# Altium PCB NCLP_PI_v2.PcbDoc (part 2 of 2)
Units mm, origin at the board's own origin, x right, y up, seen from the top; angles counter-clockwise.
Board outline 75.03 x 78.89 mm, 6 copper layers (Top Layer, In_1, In_2, In_3, In_4, Bottom Layer), stack 0.816 mm thick; 104 components, 121 nets, 419 pads, 484 vias.
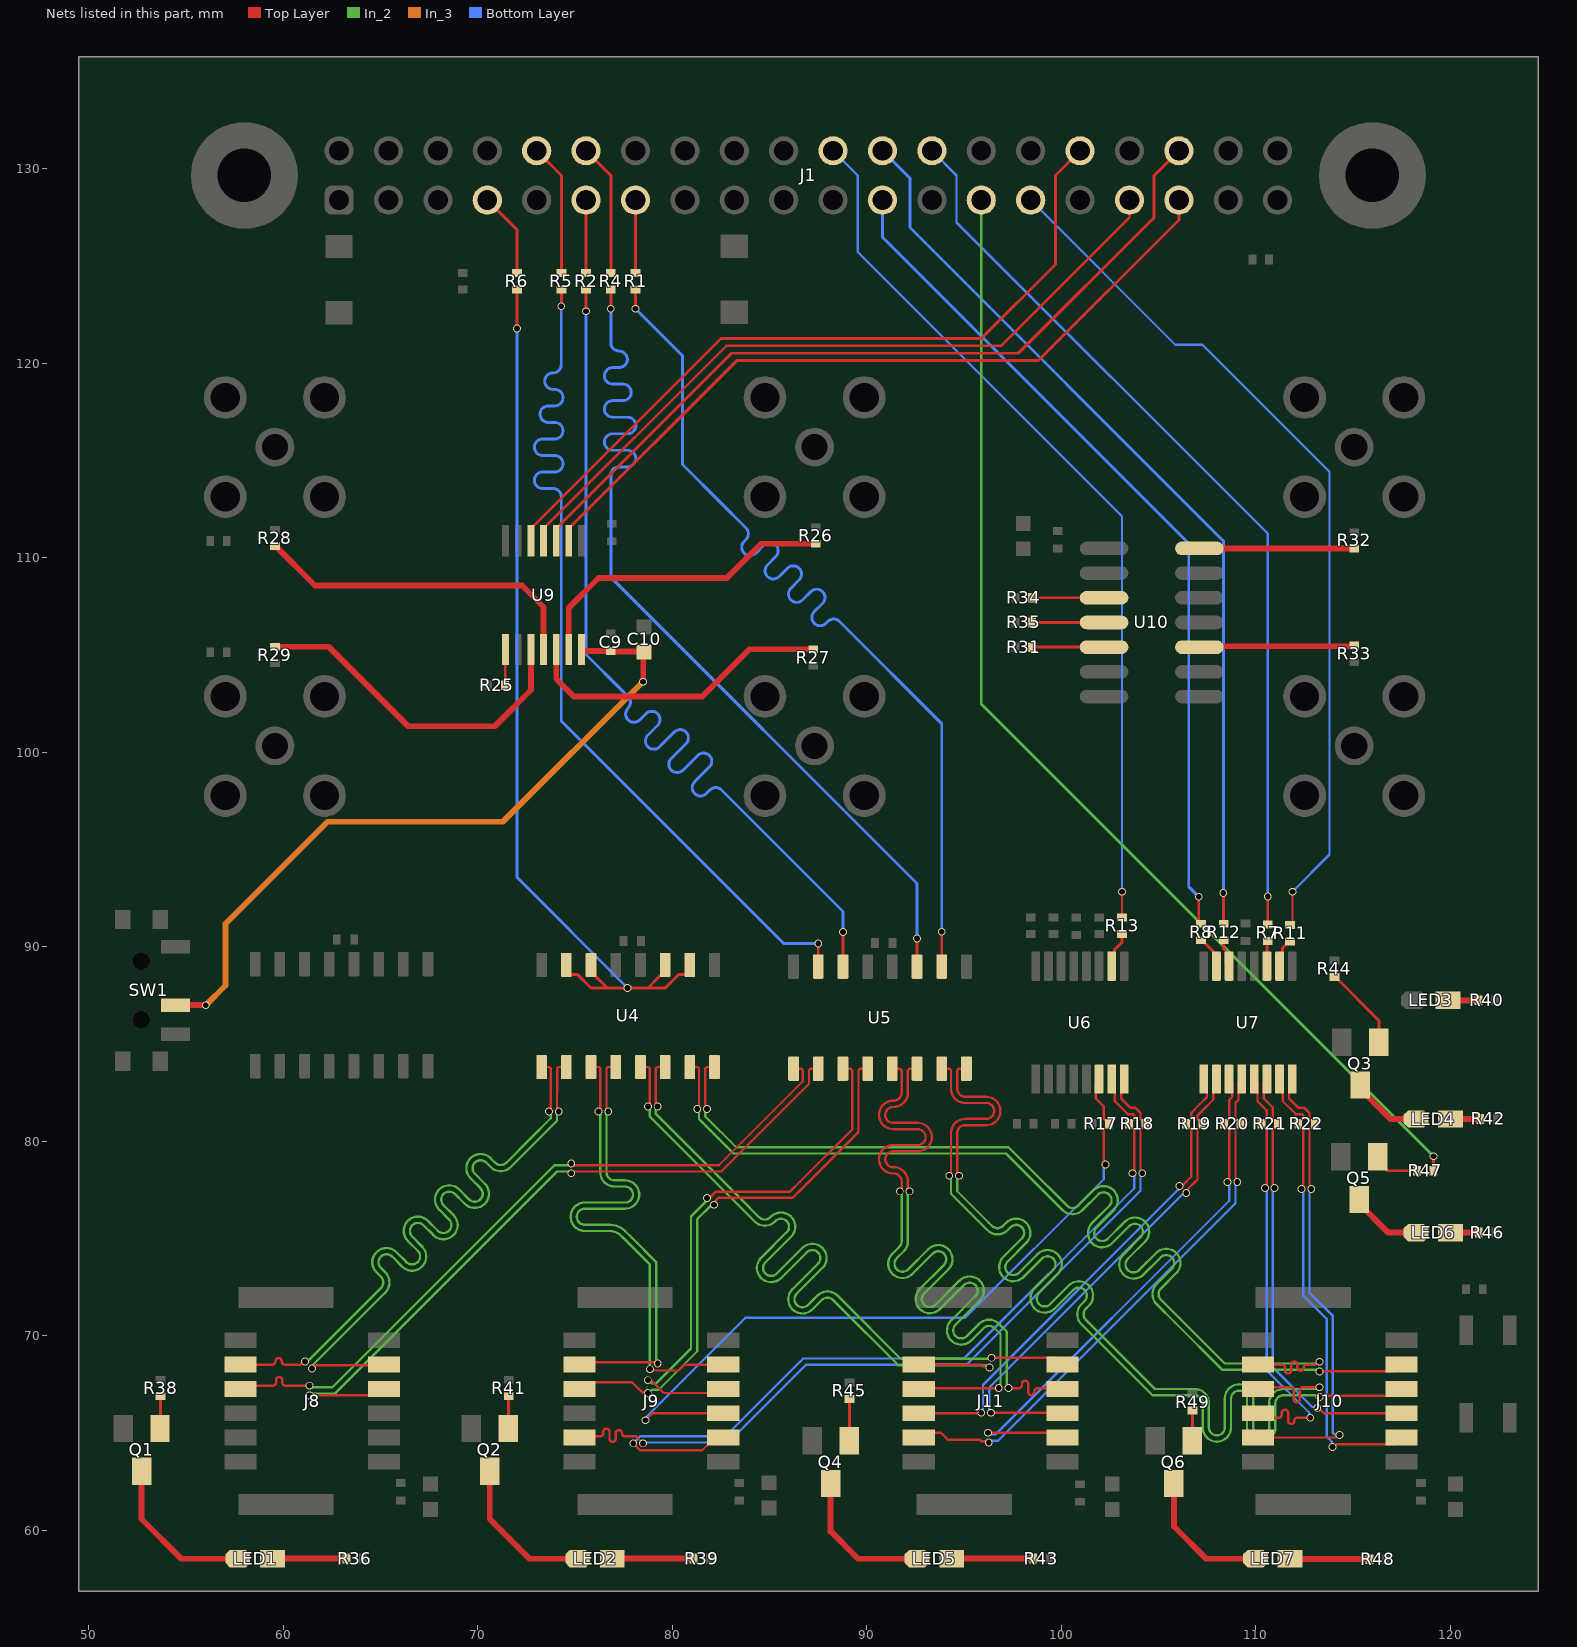
[diagram p6: the nets of this part, all layers, seen from the top]

## Via types
v1: diameter 0.4, hole 0.3, Top Layer to Bottom Layer, tented both sides, 484 vias

## Nets (pads, with @x,y where several pads share a name; then routed paths per layer and width w, separated by ;. In a path a pad name is that pad's centre, name@x,y a point inside that pad or via, vN(x,y) a via of type N, cw(c..) or ccw(c..) an arc to the next point about the centre after c; other vN are vias at no path point) (continued)
MISO_B1_P: J9.8 R17.1 U6.6 | length 38.7
  Top Layer w0.12: v1(78.613,65.659) 78.974,66.02 J9.8@82.619,66.02 ; U6.6@101.94,83.206 101.775,83.041 101.775,82.199 102.185,81.789 102.185,81.159 102.255,81.089 102.31,81.089 102.45,80.949 102.45,80.849 102.31,80.709 102.255,80.709 102.185,80.639 102.185,79.6 102.178,79.593 102.178,78.97 102.268,78.88 v1(102.268,78.804)
  Bottom Layer w0.12: v1(78.613,65.659) 78.667,65.712 78.667,65.84 83.754,70.927 95.051,70.927 102.178,78.053 102.178,78.638 102.268,78.728 v1(102.268,78.804)
MISO_B2: J1.22 R13.2 | length 45.6
  Top Layer w0.12: R13.2@103.124,91.509 v1(103.124,92.837)
  Bottom Layer w0.12: J1.22@88.265,130.937 89.535,129.667 89.535,125.73 103.124,112.141 v1(103.124,92.837)
MISO_B2': R13.1 U6.10 | length 1.9
  Top Layer w0.15: U6.10@102.59,89.006 102.74,89.156 102.74,89.85 103.124,90.234 R13.1@103.124,90.659
MISO_B2_N: J9.9 R18.2 U6.8 | length 42.6
  Top Layer w0.12: J9.9@75.229,64.77 75.29,64.831 76.229,64.831 76.289,64.831 ccw(c76.289,64.991) 76.449,64.991 76.449,65.071 cw(c76.609,65.071) 76.769,65.071 76.769,64.708 ccw(c76.929,64.708) 77.089,64.708 77.089,64.991 cw(c77.249,64.991) 77.409,64.991 ccw(c77.569,64.991) 77.569,64.831 77.921,64.831 78.135,64.831 78.486,64.48 v1(78.486,64.471) ; U6.8@103.24,83.206 103.075,83.041 103.075,82.199 103.555,81.719 103.813,81.719 104.071,81.461 104.071,81.159 104.141,81.089 104.196,81.089 104.336,80.949 R18.2@104.336,80.899 104.336,80.849 104.196,80.709 104.141,80.709 104.071,80.639 104.071,78.486 104.161,78.396 v1(104.161,78.359)
  Bottom Layer w0.12: v1(78.486,64.471) 78.486,64.516 82.87,64.516 86.868,68.514 95.129,68.514 104.071,77.456 104.071,78.193 104.161,78.283 v1(104.161,78.359)
MISO_B2_P: J9.10 R18.1 U6.7 | length 42.9
  Top Layer w0.12: v1(77.986,64.471) 77.986,64.462 78.337,64.111 81.541,64.111 82.2,64.77 J9.10@82.619,64.77 ; U6.7@102.59,83.206 102.755,83.041 102.755,82.066 103.422,81.399 103.681,81.399 103.751,81.329 103.751,81.159 103.681,81.089 103.626,81.089 103.486,80.949 R18.1@103.486,80.899 103.486,80.849 103.626,80.709 103.681,80.709 103.751,80.639 103.751,78.486 103.661,78.396 v1(103.661,78.359)
  Bottom Layer w0.12: v1(77.986,64.471) 78.126,64.611 78.126,64.62 78.337,64.831 78.346,64.831 78.351,64.836 82.737,64.836 86.735,68.834 94.996,68.834 103.751,77.589 103.751,78.193 103.661,78.283 v1(103.661,78.359)
MISO_C1: J1.23 R8.2 | length 44
  Top Layer w0.15: v1(107.068,92.576) 107.068,91.306 R8.2@107.188,91.186
  Bottom Layer w0.15: J1.23@90.805,128.397 90.805,126.492 106.553,110.744 106.553,93.091 v1(107.068,92.576)
MISO_C1': R8.1 U7.15 | length 1.7
  Top Layer w0.15: R8.1@107.188,90.336 107.238,90.336 107.826,89.748 107.826,89.156 U7.15@107.976,89.006
MISO_C1_N: J11.7 R19.2 U7.1 | length 25.6
  Top Layer w0.12: J11.7@92.669,66.02 95.865,66.02 v1(95.885,66.04) ; v1(106.072,77.697) 106.126,77.75 106.253,77.75 106.68,78.177 106.68,79.689 106.68,80.639 106.61,80.709 106.555,80.709 106.415,80.849 R19.2@106.415,80.899 106.415,80.949 106.555,81.089 106.61,81.089 106.68,81.159 106.68,81.462 107.123,81.905 107.491,82.273 107.491,83.041 U7.1@107.326,83.206
  Bottom Layer w0.12: v1(95.885,66.04) 95.885,66.116 95.975,66.206 95.975,67.472 106.019,77.516 106.019,77.643 v1(106.072,77.697)
MISO_C1_P: J11.8 R19.1 U7.2 | length 26.1
  Top Layer w0.12: v1(96.385,66.04) 100.039,66.04 J11.8@100.059,66.02 ; v1(106.426,77.343) 106.48,77.397 106.48,77.524 107,78.044 107,79.821 107,80.639 107.07,80.709 107.125,80.709 107.265,80.849 R19.1@107.265,80.899 107.265,80.949 107.125,81.089 107.07,81.089 107,81.159 107,81.329 107.256,81.585 107.811,82.14 107.811,83.041 U7.2@107.976,83.206
  Bottom Layer w0.12: v1(96.385,66.04) 96.385,66.116 96.295,66.206 96.295,67.339 106.245,77.289 106.372,77.289 v1(106.426,77.343)
MISO_C2: J1.24 R12.2 | length 47
  Top Layer w0.15: v1(108.331,92.777) 108.331,91.205 R12.2@108.349,91.186
  Bottom Layer w0.15: J1.24@90.805,130.937 92.218,129.524 92.218,126.984 108.331,110.871 v1(108.331,92.777)
MISO_C2': R12.1 U7.14 | length 1.4
  Top Layer w0.15: R12.1@108.349,90.336 108.349,89.911 108.476,89.785 108.476,89.156 U7.14@108.626,89.006
MISO_C2_N: J11.9 R20.2 U7.4 | length 28.6
  Top Layer w0.12: J11.9@92.669,64.77 93.088,64.77 93.334,65.016 93.807,65.016 94.167,64.656 95.817,64.656 95.904,64.57 96.212,64.57 v1(96.266,64.516) ; v1(109.045,77.909) 108.955,77.999 108.955,80.639 109.025,80.709 109.08,80.709 109.22,80.849 R20.2@109.22,80.899 109.22,80.949 109.08,81.089 109.025,81.089 108.955,81.159 108.955,81.987 109.111,82.143 109.111,83.041 U7.4@109.276,83.206
  Bottom Layer w0.12: v1(96.266,64.516) 96.342,64.516 96.432,64.606 96.747,64.606 108.955,76.814 108.955,77.743 109.045,77.833 v1(109.045,77.909)
MISO_C2_P: J11.10 R20.1 U7.3 | length 28.3
  Top Layer w0.12: v1(96.235,65.016) 99.305,65.016 99.805,64.516 J11.10@100.059,64.77 ; v1(108.545,77.909) 108.635,77.999 108.635,80.639 108.565,80.709 108.51,80.709 108.37,80.849 R20.1@108.37,80.899 108.37,80.949 108.51,81.089 108.565,81.089 108.635,81.159 108.635,82.12 108.791,82.276 108.791,83.041 U7.3@108.626,83.206
  Bottom Layer w0.12: v1(96.235,65.016) 96.31,65.016 96.4,64.926 96.615,64.926 108.635,76.946 108.635,77.743 108.545,77.833 v1(108.545,77.909)
MISO_D1: J1.26 R7.2 | length 46.9
  Top Layer w0.12: R7.2@110.615,91.153 110.617,91.155 v1(110.617,92.583)
  Bottom Layer w0.12: J1.26@93.345,130.937 94.615,129.667 94.615,127.254 110.617,111.252 v1(110.617,92.583)
MISO_D1': R7.1 U7.11 | length 1.3
  Top Layer w0.15: U7.11@110.576,89.006 110.576,90.264 R7.1@110.615,90.303
MISO_D1_N: J10.7 R21.2 U7.5 | length 22.8
  Top Layer w0.12: U7.5@109.926,83.206 110.091,83.041 110.091,82.066 110.559,81.598 110.559,81.159 110.489,81.089 110.434,81.089 110.294,80.949 R21.2@110.294,80.899 110.294,80.849 110.434,80.709 110.489,80.709 110.559,80.639 110.559,79.184 110.559,78.522 110.559,77.761 110.469,77.671 v1(110.469,77.595) ; J10.7@110.109,66.02 110.34,65.789 111.122,65.789 111.182,65.789 ccw(c111.182,65.949) 111.342,65.949 111.342,66.04 cw(c111.502,66.04) 111.662,66.04 111.662,65.627 ccw(c111.822,65.627) 111.982,65.627 111.982,65.629 cw(c112.142,65.629) 112.142,65.789 112.512,65.789 v1(112.797,65.789)
  Bottom Layer w0.12: v1(110.469,77.595) 110.469,77.519 110.559,77.429 110.559,68.234 112.751,66.041 112.751,65.835 v1(112.797,65.789)
MISO_D1_P: J10.8 R21.1 U7.6 | length 23.1
  Top Layer w0.12: U7.6@110.576,83.206 110.411,83.041 110.411,82.199 110.879,81.731 110.879,81.159 110.949,81.089 111.004,81.089 111.144,80.949 R21.1@111.144,80.899 111.144,80.849 111.004,80.709 110.949,80.709 110.879,80.639 110.879,79.504 110.879,78.389 110.879,77.761 110.969,77.671 v1(110.969,77.595) ; v1(113.157,66.294) 113.232,66.294 113.506,66.02 J10.8@117.499,66.02
  Bottom Layer w0.12: v1(110.969,77.595) 110.969,77.519 110.879,77.429 110.879,68.366 112.905,66.34 113.111,66.34 v1(113.157,66.294)
MISO_D2: J1.29 R11.2 | length 45.3
  Top Layer w0.12: R11.2@111.76,91.128 111.887,91.255 v1(111.887,92.837)
  Bottom Layer w0.12: J1.29@98.425,128.397 105.86,120.962 107.257,120.962 113.792,114.427 113.792,94.742 v1(111.887,92.837)
MISO_D2': R11.1 U7.10 | length 1.5
  Top Layer w0.15: U7.10@111.226,89.006 111.376,89.156 111.376,89.944 111.71,90.278 R11.1@111.76,90.278
MISO_D2_N: J10.9 R22.2 U7.8 | length 24.3
  Top Layer w0.12: J10.9@110.109,64.77 114.097,64.77 114.224,64.897 v1(114.3,64.897) ; U7.8@111.876,83.206 111.711,83.041 111.711,82.199 112.19,81.719 112.507,81.719 112.765,81.462 112.765,81.159 112.835,81.089 112.89,81.089 113.03,80.949 R22.2@113.03,80.899 112.765,80.634 112.765,77.64 v1(112.855,77.55)
  Bottom Layer w0.12: v1(112.855,77.55) 112.855,77.474 112.765,77.384 112.765,72.211 113.964,71.012 113.964,64.999 114.034,64.929 114.268,64.929 v1(114.3,64.897)
MISO_D2_P: J10.10 R22.1 U7.7 | length 24.3
  Top Layer w0.12: U7.7@111.226,83.206 111.391,83.041 111.391,82.066 112.058,81.399 112.375,81.399 112.445,81.329 112.445,81.159 112.375,81.089 112.32,81.089 112.18,80.949 R22.1@112.18,80.899 112.445,80.634 112.445,77.64 v1(112.355,77.55) ; v1(113.946,64.283) 114.022,64.283 114.163,64.424 117.153,64.424 J10.10@117.499,64.77
  Bottom Layer w0.12: v1(112.355,77.55) 112.355,77.474 112.445,77.384 112.445,72.078 113.644,70.879 113.644,64.817 113.914,64.548 113.914,64.316 v1(113.946,64.283)
MOSI_A: J1.10 R5.2 | length 6.9
  Top Layer w0.15: J1.10@73.025,130.937 73.025,130.81 73.152,130.81 74.295,129.667 R5.2@74.295,124.656
MOSI_A': R5.1 U5.7 | length 48.4
  Top Layer w0.15: v1(74.288,122.944) 74.295,122.936 R5.1@74.295,123.806 ; U5.7@87.503,88.985 v1(87.503,90.17)
  Bottom Layer w0.15: v1(74.288,122.944) 74.288,120.606 74.288,119.942 cw(c73.863,119.942) 73.863,119.517 ccw(c73.863,119.092) 73.863,118.667 73.953,118.667 cw(c73.953,118.242) 73.953,117.817 73.623,117.817 ccw(c73.623,117.392) 73.623,116.967 73.953,116.967 cw(c73.953,116.542) 73.953,116.117 73.333,116.117 ccw(c73.333,115.692) 73.333,115.267 73.953,115.267 cw(c73.953,114.842) 73.953,114.417 73.333,114.417 ccw(c73.333,113.992) 73.333,113.567 73.863,113.567 cw(c73.863,113.142) 74.288,113.142 74.288,113.067 74.288,101.607 85.725,90.17 v1(87.503,90.17)
MOSI_A_N: J8.5 U5.9 | length 37.3
  Top Layer w0.12: J8.5@57.789,67.27 57.956,67.437 59.404,67.437 59.464,67.437 ccw(c59.464,67.597) 59.624,67.597 59.624,67.722 cw(c59.784,67.722) 59.944,67.722 59.944,67.597 ccw(c60.104,67.597) 60.104,67.437 60.674,67.437 v1(61.341,67.437) ; v1(74.803,78.859) 74.879,78.859 74.969,78.769 82.386,78.769 86.708,83.091 86.708,83.665 86.638,83.735 U5.9@86.233,83.735
  In_2 w0.12: v1(61.341,67.437) 61.417,67.437 61.507,67.347 62.515,67.347 73.937,78.769 74.637,78.769 74.727,78.859 v1(74.803,78.859)
MOSI_A_P: J8.6 U5.10 | length 37.6
  Top Layer w0.12: v1(61.341,66.937) 64.846,66.937 J8.6@65.179,67.27 ; v1(74.803,78.359) 74.879,78.359 74.969,78.449 82.519,78.449 87.028,82.958 87.028,83.665 87.098,83.735 U5.10@87.503,83.735
  In_2 w0.12: v1(61.341,66.937) 61.417,66.937 61.507,67.027 62.648,67.027 74.07,78.449 74.637,78.449 74.727,78.359 v1(74.803,78.359)
MOSI_B: J1.11 R2.2 | length 3.7
  Top Layer w0.15: R2.2@75.565,124.656 75.565,126.307 J1.11@75.565,128.397
MOSI_B': R2.1 U5.6 | length 49.9
  Top Layer w0.15: v1(75.565,122.682) R2.1@75.565,123.806 ; U5.6@88.773,88.985 v1(88.773,90.765)
  Bottom Layer w0.15: v1(75.565,122.682) 75.565,105.029 77.343,103.251 77.72,102.874 cw(c77.42,102.573) 77.72,102.273 ccw(c78.021,101.972) 77.72,101.672 ccw(c78.021,101.972) 78.321,101.672 78.639,101.99 cw(c78.94,101.689) 79.24,101.99 cw(c78.94,101.689) 79.24,101.389 78.741,100.89 ccw(c79.042,100.589) 78.741,100.289 ccw(c79.042,100.589) 79.342,100.289 80.099,101.045 cw(c80.4,100.745) 80.7,101.045 cw(c80.4,100.745) 80.7,100.444 79.943,99.688 ccw(c80.244,99.387) 79.943,99.086 ccw(c80.244,99.387) 80.544,99.086 81.301,99.843 cw(c81.602,99.543) 81.902,99.843 cw(c81.602,99.543) 81.902,99.242 81.145,98.485 ccw(c81.446,98.185) 81.145,97.884 ccw(c81.446,98.185) 81.747,97.884 81.928,98.065 cw(c82.228,97.765) 82.529,98.065 82.582,98.012 88.773,91.821 v1(88.773,90.765)
MOSI_B_N: J9.5 U5.12 | length 28.4
  Top Layer w0.12: J9.5@75.229,67.27 75.523,66.976 75.523,67.145 75.995,67.616 77.926,67.616 78.464,67.078 78.718,67.078 v1(78.74,67.056) ; v1(82.142,76.735) 82.195,76.789 82.195,76.916 82.374,77.095 86.184,77.095 86.686,77.597 89.568,80.479 89.568,83.665 89.638,83.735 U5.12@90.043,83.735
  In_2 w0.12: v1(78.74,67.056) 78.779,67.056 78.95,67.228 79.298,67.228 81.28,69.209 81.28,76.001 81.961,76.682 82.088,76.682 v1(82.142,76.735)
MOSI_B_P: J9.6 U5.11 | length 27.8
  Top Layer w0.12: v1(78.74,67.719) 78.794,67.666 78.95,67.666 79.56,67.056 82.405,67.056 J9.6@82.619,67.27 ; v1(81.788,77.089) 81.842,77.143 81.969,77.143 82.242,77.415 86.051,77.415 86.553,77.917 89.248,80.612 89.248,83.665 89.178,83.735 U5.11@88.773,83.735
  In_2 w0.12: v1(78.74,67.719) 78.779,67.719 78.95,67.548 79.166,67.548 80.96,69.342 80.96,76.134 81.734,76.908 81.734,77.035 v1(81.788,77.089)
MOSI_C: J1.12 R4.2 | length 7
  Top Layer w0.15: J1.12@75.565,130.937 76.835,129.667 R4.2@76.835,124.656 ; R4.2@76.835,124.654 76.96,124.529 R4.2@76.962,124.529
MOSI_C': R4.1 U5.3 | length 49.3
  Top Layer w0.15: v1(76.835,122.809) R4.1@76.835,123.806 ; U5.3@92.583,88.985 v1(92.583,90.424)
  Bottom Layer w0.15: v1(76.835,122.809) 76.835,121.801 76.835,121.059 ccw(c77.26,121.059) 77.26,120.634 cw(c77.26,120.209) 77.26,119.784 76.933,119.784 ccw(c76.933,119.359) 76.933,118.934 77.456,118.934 cw(c77.456,118.509) 77.456,118.084 76.933,118.084 ccw(c76.933,117.659) 76.933,117.234 77.697,117.234 cw(c77.697,116.809) 77.697,116.384 76.933,116.384 ccw(c76.933,115.959) 76.933,115.534 77.697,115.534 cw(c77.697,115.109) 77.697,114.684 77.26,114.684 ccw(c77.26,114.259) 76.835,114.259 76.835,113.334 76.835,109.005 92.583,93.257 v1(92.583,90.424)
MOSI_C_N: J11.5 U5.13 | length 40.5
  Top Layer w0.12: U5.13@91.313,83.735 91.718,83.735 91.788,83.665 ; v1(91.698,77.429) 91.747,77.429 91.788,77.47 91.788,77.719 91.788,77.939 ccw(c91.378,77.939) 91.378,78.349 91.356,78.349 cw(c91.356,79.079) 90.626,79.079 cw(c91.356,79.079) 91.356,79.809 92.61,79.809 ccw(c92.61,80.219) 93.02,80.219 ccw(c92.61,80.219) 92.61,80.629 91.356,80.629 cw(c91.356,81.359) 90.626,81.359 cw(c91.356,81.359) 91.356,82.089 91.378,82.089 ccw(c91.378,82.499) 91.788,82.499 91.788,83.664 ; J11.5@92.669,67.27 92.709,67.31 v1(96.782,67.31)
  In_2 w0.12: v1(91.698,77.429) 91.698,77.353 91.788,77.263 91.788,76.45 91.788,74.862 cw(c91.378,74.862) 91.668,74.572 91.316,74.22 ccw(c91.832,73.704) 92.348,73.188 93.386,74.226 cw(c93.676,73.936) 93.966,74.226 cw(c93.676,73.936) 93.966,73.646 ; 93.965,73.645 92.725,72.405 ccw(c93.241,71.889) 93.706,71.325 93.71,71.325 94.998,72.613 cw(c95.288,72.324) 95.578,72.613 cw(c95.288,72.324) 95.578,72.034 94.337,70.793 ccw(c94.853,70.276) 95.318,69.713 95.322,69.713 95.996,70.387 cw(c96.286,70.097) 96.576,70.387 96.872,70.09 96.872,69.566 96.872,67.476 96.782,67.386 v1(96.782,67.31)
MOSI_C_P: J11.6 U5.14 | length 40.2
  Top Layer w0.12: 92.108,83.664 92.108,82.499 cw(c91.378,82.499) 91.378,81.769 91.356,81.769 ccw(c91.356,81.359) 90.946,81.359 ccw(c91.356,81.359) 91.356,80.949 92.61,80.949 cw(c92.61,80.219) 93.34,80.219 cw(c92.61,80.219) 92.61,79.489 91.356,79.489 ccw(c91.356,79.079) 90.946,79.079 ccw(c91.356,79.079) 91.356,78.669 91.378,78.669 cw(c91.378,77.939) 92.108,77.939 92.108,77.719 92.108,77.47 92.149,77.429 v1(92.198,77.429) ; 92.108,83.665 92.178,83.735 U5.14@92.583,83.735 ; v1(97.282,67.31) 97.758,67.31 97.818,67.31 ccw(c97.818,67.47) 97.978,67.47 97.978,67.534 cw(c98.138,67.534) 98.298,67.534 98.298,67.111 ccw(c98.458,67.111) 98.618,67.111 98.618,67.15 cw(c98.778,67.15) 98.778,67.31 99.155,67.31 100.019,67.31 J11.6@100.059,67.27
  In_2 w0.12: v1(92.198,77.429) 92.198,77.353 92.108,77.263 92.108,76.621 92.108,74.862 cw(c91.378,74.862) 91.894,74.346 91.542,73.994 ccw(c91.832,73.704) 91.542,73.414 ccw(c91.832,73.704) 92.122,73.414 93.16,74.452 cw(c93.676,73.936) 94.192,74.452 cw(c93.676,73.936) 94.239,73.471 94.239,73.466 92.951,72.178 ccw(c93.241,71.889) 92.951,71.599 ccw(c93.241,71.889) 93.531,71.599 ; 93.531,71.599 94.772,72.84 cw(c95.288,72.324) 95.804,72.84 cw(c95.288,72.324) 95.851,71.859 95.851,71.854 94.563,70.566 ccw(c94.853,70.276) 94.563,69.987 ; 94.563,69.986 ccw(c94.853,70.276) 95.143,69.986 ; 95.144,69.987 95.77,70.613 cw(c96.286,70.097) 96.802,70.613 97.192,70.223 97.192,69.886 97.192,67.476 97.282,67.386 v1(97.282,67.31)
MOSI_D: J1.13 R1.2 | length 3.7
  Top Layer w0.15: R1.2@78.105,124.656 78.105,126.307 J1.13@78.105,128.397
MOSI_D': R1.1 U5.2 | length 49.1
  Top Layer w0.15: v1(78.105,122.809) 78.105,123.444 R1.1@78.105,123.806 ; U5.2@93.853,88.985 v1(93.853,90.773)
  Bottom Layer w0.15: v1(78.105,122.809) 80.518,120.396 80.518,114.808 82.486,112.84 83.785,111.541 cw(c83.484,111.241) 83.785,110.94 83.689,110.845 ccw(c83.99,110.545) 83.689,110.244 ccw(c83.99,110.545) 84.291,110.244 84.715,110.668 cw(c85.015,110.368) 85.316,110.668 cw(c85.015,110.368) 85.316,110.067 84.892,109.643 ccw(c85.192,109.343) 84.892,109.042 ccw(c85.192,109.343) 85.493,109.042 85.917,109.466 cw(c86.217,109.166) 86.518,109.466 cw(c86.217,109.166) 86.518,108.865 86.094,108.441 ccw(c86.394,108.14) 86.094,107.84 ccw(c86.394,108.14) 86.695,107.84 87.119,108.264 cw(c87.42,107.964) 87.72,108.264 cw(c87.42,107.964) 87.72,107.663 87.296,107.239 ccw(c87.596,106.938) 87.296,106.638 ccw(c87.596,106.938) 87.897,106.638 87.992,106.733 cw(c88.292,106.433) 88.593,106.733 88.646,106.68 93.853,101.473 v1(93.853,90.773)
MOSI_D_N: J10.5 U5.16 | length 55.5
  Top Layer w0.12: v1(94.742,78.232) 94.742,78.308 94.652,78.398 94.652,78.745 94.648,78.749 94.648,79.063 94.648,80.423 cw(c95.058,80.423) 95.058,80.833 96.139,80.833 ccw(c96.139,81.563) 96.869,81.563 ccw(c96.139,81.563) 96.139,82.293 95.058,82.293 cw(c95.058,82.703) 94.648,82.703 94.648,83.595 94.648,83.665 94.718,83.735 U5.16@95.123,83.735 ; J10.5@110.109,67.27 110.194,67.355 111.408,67.355 111.788,67.355 cw(c111.788,67.195) 111.948,67.195 111.948,66.738 ccw(c112.108,66.738) 112.268,66.738 112.268,67.195 cw(c112.428,67.195) 112.428,67.355 113.042,67.355 v1(113.284,67.355)
  In_2 w0.12: v1(94.742,78.232) 94.742,78.156 94.652,78.066 94.652,77.433 96.274,75.811 96.429,75.656 ccw(c96.719,75.946) 97.009,75.656 97.164,75.81 cw(c97.68,75.294) 98.196,75.81 cw(c97.68,75.294) 98.243,74.83 98.243,74.825 97.242,73.824 ccw(c97.532,73.534) 97.242,73.245 ; 97.243,73.244 ccw(c97.532,73.534) 97.822,73.245 ; 97.823,73.245 98.776,74.198 cw(c99.292,73.682) 99.808,74.198 cw(c99.292,73.682) 99.855,73.217 99.855,73.213 98.854,72.212 ccw(c99.144,71.922) 98.854,71.632 ccw(c99.144,71.922) 99.434,71.632 ; 99.435,71.633 100.388,72.586 cw(c100.904,72.07) 101.42,72.586 cw(c100.904,72.07) 101.467,71.605 101.467,71.601 101.266,71.399 ccw(c101.556,71.109) 101.265,70.82 102.243,69.842 104.82,67.265 105.5,67.265 106.86,67.265 cw(c106.86,66.535) 107.59,66.535 107.59,65.289 ccw(c108,65.289) 108,64.879 ccw(c108,65.289) 108.41,65.289 108.41,66.773 cw(c109.14,66.773) 109.14,67.503 cw(c109.14,66.773) 109.87,66.773 109.87,65.289 ccw(c110.28,65.289) 110.28,64.879 ccw(c110.28,65.289) 110.69,65.289 110.69,66.535 cw(c111.42,66.535) 111.42,67.265 113.132,67.265 113.214,67.265 113.284,67.335 v1(113.284,67.355)
MOSI_D_P: J10.6 U5.15 | length 55.9
  Top Layer w0.12: U5.15@93.853,83.735 94.258,83.735 94.328,83.665 94.328,83.595 94.328,82.703 ccw(c95.058,82.703) 95.058,81.973 96.139,81.973 cw(c96.139,81.563) 96.549,81.563 cw(c96.139,81.563) 96.139,81.153 95.058,81.153 ccw(c95.058,80.423) 94.328,80.423 94.328,79.063 94.328,78.616 94.332,78.612 94.332,78.398 94.242,78.308 v1(94.242,78.232) ; v1(113.284,66.855) 113.36,66.855 113.429,66.924 117.153,66.924 J10.6@117.499,67.27
  In_2 w0.12: v1(94.242,78.232) 94.242,78.156 94.332,78.066 94.332,77.3 96.047,75.585 96.202,75.43 ccw(c96.719,75.946) 97.235,75.43 97.39,75.584 cw(c97.68,75.294) 97.97,75.584 cw(c97.68,75.294) 97.97,75.004 ; 97.969,75.004 97.016,74.051 ccw(c97.532,73.534) 97.997,72.971 98.001,72.971 99.002,73.972 cw(c99.292,73.682) 99.582,73.972 cw(c99.292,73.682) 99.582,73.392 ; 99.581,73.392 98.628,72.438 ccw(c99.144,71.922) 98.628,71.406 ccw(c99.144,71.922) 99.609,71.359 99.614,71.359 100.614,72.36 cw(c100.904,72.07) 101.194,72.36 cw(c100.904,72.07) 101.194,71.78 ; 101.193,71.779 101.039,71.625 ccw(c101.556,71.109) 101.04,70.592 102.016,69.616 104.688,66.945 105.5,66.945 106.86,66.945 cw(c106.86,66.535) 107.27,66.535 107.27,65.289 ccw(c108,65.289) 108,64.559 ccw(c108,65.289) 108.73,65.289 108.73,66.773 cw(c109.14,66.773) 109.14,67.183 cw(c109.14,66.773) 109.55,66.773 109.55,65.289 ccw(c110.28,65.289) 110.28,64.559 ccw(c110.28,65.289) 111.01,65.289 111.01,66.535 cw(c111.42,66.535) 111.42,66.945 113.132,66.945 113.214,66.945 113.284,66.874 v1(113.284,66.855)
NetLED1_1: LED1.1 R36.2 | length 3.8
  Top Layer w0.3: LED1.1@59.436,58.54 59.439,58.544 63.243,58.544 R36.2@63.246,58.547
NetLED1_2: LED1.2 Q1.3 | length 8.3
  Top Layer w0.3: Q1.3@52.705,63.035 52.705,60.579 54.744,58.54 LED1.2@57.658,58.54
NetLED2_1: LED2.1 R39.2 | length 4.2
  Top Layer w0.3: LED2.1@76.914,58.54 76.917,58.544 81.081,58.544 R39.2@81.084,58.547
NetLED2_2: LED2.2 Q2.3 | length 7.8
  Top Layer w0.3: Q2.3@70.612,63.035 70.612,60.579 72.651,58.54 LED2.2@75.136,58.54
NetLED3_1: LED3.1 R40.2 | length 1.6
  Top Layer w0.3: LED3.1@119.888,87.249 R40.2@121.451,87.249
NetLED4_1: LED4.1 R42.2 | length 1.5
  Top Layer w0.3: LED4.1@120.015,81.146 120.018,81.15 121.536,81.15 R42.2@121.539,81.153
NetLED4_2: LED4.2 Q3.3 | length 3.7
  Top Layer w0.3: Q3.3@115.377,82.89 115.377,82.69 116.921,81.146 LED4.2@118.237,81.146
NetLED5_1: LED5.1 R43.2 | length 4.2
  Top Layer w0.3: LED5.1@94.361,58.54 94.364,58.544 98.549,58.544 R43.2@98.552,58.547
NetLED5_2: LED5.2 Q4.3 | length 7.5
  Top Layer w0.3: Q4.3@88.138,62.4 88.138,59.944 89.542,58.54 LED5.2@92.583,58.54
NetLED6_1: LED6.1 R46.2 | length 1.5
  Top Layer w0.3: LED6.1@120.015,75.304 120.018,75.308 121.467,75.308 R46.2@121.47,75.311
NetLED6_2: LED6.2 Q5.3 | length 3.7
  Top Layer w0.3: Q5.3@115.316,77.005 115.316,76.805 116.817,75.304 LED6.2@118.237,75.304
NetLED7_1: LED7.1 R48.2 | length 4.1
  Top Layer w0.3: LED7.1@111.76,58.54 111.778,58.522 115.824,58.522 R48.2@115.842,58.504
NetLED7_2: LED7.2 Q6.3 | length 7.1
  Top Layer w0.3: Q6.3@105.791,62.4 105.791,60.198 107.449,58.54 LED7.2@109.982,58.54
NetQ1_1: Q1.1 R38.2 | length 1.7
  Top Layer w0.15: Q1.1@53.655,65.235 53.681,65.261 R38.2@53.681,66.891
NetQ2_1: Q2.1 R41.2 | length 1.7
  Top Layer w0.15: Q2.1@71.585,65.258 R41.2@71.585,66.891
  Top Layer w0.3: Q2.1@71.562,65.235 Q2.1@71.585,65.258
NetQ3_1: Q3.1 R44.2 | length 4.3
  Top Layer w0.15: R44.2@114.046,88.45 114.096,88.45 116.327,86.219 Q3.1@116.327,85.09
NetQ4_1: Q4.1 R45.2 | length 2.2
  Top Layer w0.15: Q4.1@89.088,64.6 89.105,64.617 R45.2@89.105,66.747
NetQ5_1: Q5.1 R47.2 | length 2.4
  Top Layer w0.15: Q5.1@116.266,79.205 116.266,79.005 116.785,78.486 R47.2@118.295,78.486
NetQ6_1: Q6.1 R49.2 | length 1.6
  Top Layer w0.15: Q6.1@106.741,64.6 106.752,64.611 R49.2@106.752,66.163
NetR25_2: R25.2 U9.8 | length 1.8
  Top Layer w0.15: R25.2@71.387,103.454 71.407,103.473 71.407,105.264 U9.8@71.426,105.283
NetR26_1: R26.1 U9.13 | length 16.2
  Top Layer w0.3: U9.13@74.676,105.283 74.676,107.442 76.2,108.966 82.804,108.966 84.563,110.725 R26.1@87.376,110.725
NetR27_1: R27.1 U9.12 | length 16.1
  Top Layer w0.3: U9.12@74.026,105.283 74.026,103.774 74.93,102.87 81.534,102.87 83.966,105.302 R27.1@87.249,105.302
NetR28_1: R28.1 U9.11 | length 17.3
  Top Layer w0.3: R28.1@59.563,110.598 59.613,110.598 61.626,108.585 72.263,108.585 73.376,107.472 U9.11@73.376,105.283
NetR29_1: R29.1 U9.10 | length 17.7
  Top Layer w0.3: R29.1@59.563,105.429 62.338,105.429 66.421,101.346 70.866,101.346 72.726,103.206 U9.10@72.726,105.283
NetR31_2: R31.2 U10.5 | length 3.7
  Top Layer w0.15: R31.2@98.494,105.41 U10.5@102.198,105.41
NetR32_1: R32.1 U10.14 | length 8
  Top Layer w0.3: U10.14@107.098,110.49 107.108,110.48 115.053,110.48 R32.1@115.062,110.471
NetR33_1: R33.1 U10.10 | length 8.1
  Top Layer w0.3: U10.10@107.098,105.41 107.142,105.454 115.018,105.454 R33.1@115.062,105.498 115.012,105.498 R33.1@114.962,105.548
NetR34_2: R34.2 U10.3 | length 3.7
  Top Layer w0.15: R34.2@98.494,107.95 U10.3@102.198,107.95
NetR35_2: R35.2 U10.4 | length 3.7
  Top Layer w0.15: R35.2@98.494,106.68 U10.4@102.198,106.68
RUNNING: J1.27 R47.1 | length 59.5
  Top Layer w0.15: v1(119.138,79.236) 119.142,79.232 119.142,78.489 R47.1@119.145,78.486
  In_2 w0.15: J1.27@95.885,128.397 95.885,102.489 v1(119.138,79.236)
SCLK: J1.7 R6.2 | length 4.4
  Top Layer w0.15: J1.7@70.485,128.397 72.009,126.873 R6.2@72.009,124.656
SCLK': R6.1 U4.2 U4.3 U4.6 U4.7 | length 49.1
  Top Layer w0.15: v1(72.009,121.793) R6.1@72.009,123.806 ; U4.7@74.549,89.07 74.549,88.769 74.749,88.57 75.13,88.57 75.816,87.884 76.655,87.884 ; U4.6@75.819,89.07 75.819,88.72 76.655,87.884 ; U4.3@79.629,89.07 79.629,88.72 79.429,88.52 79.379,88.52 78.743,87.884 ; U4.2@80.899,89.07 80.899,88.769 80.699,88.57 80.318,88.57 79.632,87.884 78.743,87.884 ; 76.655,87.884 78.743,87.884
  Bottom Layer w0.15: v1(72.009,121.793) 72.009,93.574 v1(77.699,87.884)
SCLK_A_N: J8.3 U4.9 | length 34.9
  Top Layer w0.12: J8.3@57.789,68.52 59.371,68.52 59.431,68.52 ccw(c59.431,68.68) 59.591,68.68 59.591,68.698 cw(c59.751,68.698) 59.911,68.698 59.911,68.68 ccw(c60.071,68.68) 60.071,68.52 60.452,68.52 60.879,68.52 61.039,68.68 v1(61.114,68.68) ; U4.9@73.279,83.82 73.684,83.82 73.754,83.75 73.754,82.652 73.75,82.648 73.75,81.7 73.66,81.61 v1(73.66,81.534)
  In_2 w0.12: v1(61.114,68.68) 61.168,68.733 61.295,68.733 64.861,72.299 65.017,72.454 ccw(c64.727,72.744) 65.017,73.034 64.786,73.265 cw(c65.302,73.782) 64.786,74.298 cw(c65.302,73.782) 65.818,74.298 66.325,73.791 ccw(c66.615,74.081) 66.905,73.791 ccw(c66.615,74.081) 66.905,74.371 66.398,74.878 cw(c66.914,75.394) 66.398,75.91 cw(c66.914,75.394) 67.43,75.91 67.937,75.403 ccw(c68.227,75.693) 68.517,75.403 ccw(c68.227,75.693) 68.517,75.983 68.01,76.49 cw(c68.526,77.006) 68.01,77.522 cw(c68.526,77.006) 69.042,77.522 69.549,77.015 ccw(c69.839,77.305) 70.129,77.015 ccw(c69.839,77.305) 70.129,77.595 ; 70.129,77.595 69.622,78.102 cw(c70.138,78.618) 69.622,79.134 cw(c70.138,78.618) 70.655,79.134 70.886,78.903 ccw(c71.176,79.193) 71.465,78.903 72.739,80.176 73.75,81.188 73.75,81.368 73.66,81.458 v1(73.66,81.534)
SCLK_A_P: J8.4 U4.10 | length 35.2
  Top Layer w0.12: v1(61.468,68.326) 61.544,68.326 61.701,68.483 65.143,68.483 J8.4@65.179,68.52 ; v1(74.16,81.534) 74.16,81.61 74.07,81.7 74.07,82.515 74.074,82.519 74.074,83.75 74.144,83.82 U4.10@74.549,83.82
  In_2 w0.12: v1(61.468,68.326) 61.522,68.38 61.522,68.507 65.087,72.073 65.243,72.228 ccw(c64.727,72.744) 65.243,73.261 65.012,73.492 cw(c65.302,73.782) 65.012,74.071 cw(c65.302,73.782) 65.592,74.071 66.099,73.565 ccw(c66.615,74.081) 67.131,73.565 ccw(c66.615,74.081) 67.131,74.597 66.624,75.104 cw(c66.914,75.394) 66.624,75.684 cw(c66.914,75.394) 67.204,75.684 67.711,75.177 ccw(c68.227,75.693) 68.743,75.177 ccw(c68.227,75.693) 68.743,76.209 68.236,76.716 cw(c68.526,77.006) 68.236,77.296 cw(c68.526,77.006) 68.816,77.296 69.323,76.789 ccw(c69.839,77.305) 70.355,76.789 ccw(c69.839,77.305) 70.355,77.821 69.848,78.328 cw(c70.138,78.618) 69.848,78.908 cw(c70.138,78.618) 70.428,78.908 70.659,78.678 ccw(c71.176,79.193) 71.692,78.677 72.965,79.95 74.07,81.055 74.07,81.368 74.16,81.458 v1(74.16,81.534)
SCLK_B_N: J9.3 U4.12 | length 27.1
  Top Layer w0.12: J9.3@75.229,68.52 J9.3@75.402,68.347 ; J9.3@75.576,68.174 J9.3@75.402,68.347 ; v1(76.708,81.534) 76.708,81.61 76.618,81.7 76.618,82.284 76.614,82.288 76.614,83.75 76.684,83.82 U4.12@77.089,83.82 ; v1@79.338,68.472 79.248,68.563 v1(79.248,68.58) 79.172,68.58 79.107,68.645 75.701,68.645 J9.3@75.402,68.347
  In_2 w0.12: v1(76.708,81.534) 76.708,81.486 76.614,81.392 76.614,81.283 76.614,78.403 ccw(c77.024,78.403) 77.024,77.993 77.566,77.993 cw(c77.566,77.263) 77.566,76.533 75.496,76.533 ccw(c75.496,76.123) 75.496,75.713 76.775,75.713 cw(c76.775,74.58) 77.575,75.383 ; 77.576,75.381 77.909,75.048 79.164,73.793 79.164,68.79 79.194,68.76 79.194,68.634 v1(79.248,68.58) ; 77.576,75.382 ccw(c76.775,74.58) 77.575,75.383
SCLK_B_P: J9.4 U4.11 | length 26.7
  Top Layer w0.12: U4.11@75.819,83.82 76.224,83.82 76.294,83.75 76.294,82.156 76.298,82.152 76.298,81.7 76.208,81.61 v1(76.208,81.534) ; v1(78.844,68.285) 78.92,68.285 78.985,68.22 80.326,68.22 80.626,68.52 J9.4@82.2,68.52 ; J9.4@82.14,68.58 J9.4@82.2,68.52 ; J9.4@82.619,68.52 J9.4@82.2,68.52
  In_2 w0.12: v1(76.208,81.534) 76.208,81.478 76.294,81.392 76.294,81.283 76.294,78.403 ccw(c77.024,78.403) 77.024,77.673 77.566,77.673 cw(c77.566,77.263) 77.566,76.853 75.496,76.853 ccw(c75.496,76.123) 75.496,75.393 76.775,75.393 cw(c76.775,74.58) 77.349,75.156 cw(c76.775,74.58) 77.35,75.155 77.457,75.048 78.844,73.661 v1(78.844,68.285)
SCLK_C_N: J11.3 U4.13 | length 39.1
  Top Layer w0.12: U4.13@78.359,83.82 78.764,83.82 78.834,83.75 78.834,81.915 78.744,81.825 v1(78.744,81.788) ; J11.3@92.669,68.52 95.874,68.52 95.965,68.429 96.261,68.429 v1(96.314,68.376)
  In_2 w0.12: v1(78.744,81.788) 78.744,81.712 78.834,81.622 78.834,81.275 83.306,76.803 84.235,75.874 ccw(c84.752,76.39) 85.268,75.874 85.298,75.903 cw(c85.587,75.613) 85.877,75.903 cw(c85.587,75.613) 85.877,75.323 84.561,74.006 ccw(c85.077,73.49) 84.561,72.974 ccw(c85.077,73.49) 85.542,72.927 85.546,72.927 86.91,74.291 cw(c87.2,74.001) 87.49,74.291 cw(c87.2,74.001) 87.49,73.711 86.173,72.394 ccw(c86.689,71.878) 86.173,71.362 ccw(c86.689,71.878) 87.154,71.315 87.159,71.315 87.687,71.843 cw(c87.977,71.553) 88.266,71.843 88.422,71.687 91.616,68.494 96.121,68.494 96.239,68.376 v1(96.314,68.376)
SCLK_C_P: J11.4 U4.14 | length 38.8
  Top Layer w0.12: v1(79.244,81.788) 79.244,81.825 79.154,81.915 79.154,83.75 79.224,83.82 U4.14@79.629,83.82 ; v1(96.406,68.867) 99.713,68.866 J11.4@100.059,68.52
  In_2 w0.12: v1(79.244,81.788) 79.244,81.712 79.154,81.622 79.154,81.408 83.533,77.029 84.462,76.1 ccw(c84.752,76.39) 85.042,76.1 85.071,76.129 cw(c85.587,75.613) 86.104,76.129 cw(c85.587,75.613) 86.151,75.148 86.151,75.144 84.787,73.78 ccw(c85.077,73.49) 84.787,73.2 ccw(c85.077,73.49) 85.367,73.2 ; 85.368,73.201 86.683,74.517 cw(c87.2,74.001) 87.716,74.517 cw(c87.2,74.001) 87.763,73.536 87.763,73.531 86.399,72.168 ccw(c86.689,71.878) 86.399,71.588 ccw(c86.689,71.878) 86.979,71.588 87.46,72.069 cw(c87.977,71.553) 88.493,72.069 88.648,71.914 91.748,68.814 96.352,68.814 v1(96.406,68.867)
SCLK_D_N: J10.3 U4.16 | length 55.6
  Top Layer w0.12: v1(81.784,81.664) 81.694,81.754 81.694,83.75 81.764,83.82 U4.16@82.169,83.82 ; J10.3@110.109,68.52 110.961,68.52 111.341,68.52 cw(c111.341,68.36) 111.501,68.36 111.501,68.22 ccw(c111.661,68.22) 111.821,68.22 111.821,68.519 cw(c111.981,68.519) 112.141,68.519 112.141,68.36 ccw(c112.301,68.36) 112.461,68.36 cw(c112.621,68.36) 112.621,68.52 112.861,68.52 113.058,68.52 113.208,68.67 v1(113.284,68.67)
  In_2 w0.12: v1(81.784,81.664) 81.784,81.588 81.694,81.498 81.694,81.284 83.283,79.695 97.288,79.695 98.303,78.68 100.289,76.693 ccw(c100.579,76.984) 100.869,76.694 101.658,77.484 cw(c102.175,76.967) 102.691,77.484 cw(c102.175,76.967) 102.738,76.503 102.738,76.498 101.81,75.57 ccw(c102.1,75.28) 101.81,74.99 ccw(c102.1,75.28) 102.39,74.99 103.271,75.871 cw(c103.787,75.355) 104.303,75.871 cw(c103.787,75.355) 104.35,74.891 104.35,74.886 103.422,73.958 ccw(c103.712,73.668) 103.422,73.378 ccw(c103.712,73.668) 104.002,73.378 ; 104.003,73.379 104.883,74.259 cw(c105.399,73.743) 105.915,74.259 cw(c105.399,73.743) 105.962,73.278 105.962,73.274 105.125,72.437 ccw(c105.415,72.147) 105.125,71.857 106.087,70.895 108.403,68.58 113.157,68.58 113.247,68.67 v1(113.284,68.67)
SCLK_D_P: J10.4 U4.15 | length 55.9
  Top Layer w0.12: U4.15@80.899,83.82 81.304,83.82 81.374,83.75 81.374,81.754 v1(81.284,81.664) ; v1(113.284,68.17) 115.072,68.17 115.075,68.174 117.153,68.174 J10.4@117.499,68.52
  In_2 w0.12: v1(81.284,81.664) 81.284,81.588 81.374,81.498 81.374,81.151 83.15,79.375 97.155,79.375 98.077,78.453 100.062,76.468 ccw(c100.579,76.984) 101.095,76.467 101.885,77.257 cw(c102.175,76.967) 102.465,77.257 cw(c102.175,76.967) 102.465,76.677 ; 102.464,76.677 101.584,75.797 ccw(c102.1,75.28) 101.584,74.764 ccw(c102.1,75.28) 102.564,74.717 102.569,74.717 103.497,75.645 cw(c103.787,75.355) 104.077,75.645 cw(c103.787,75.355) 104.077,75.065 ; 104.076,75.065 103.196,74.184 ccw(c103.712,73.668) 103.196,73.152 ccw(c103.712,73.668) 104.177,73.105 104.181,73.105 105.109,74.033 cw(c105.399,73.743) 105.689,74.033 cw(c105.399,73.743) 105.689,73.453 ; 105.688,73.453 104.899,72.663 ccw(c105.415,72.147) 104.9,71.63 105.861,70.669 108.27,68.26 113.157,68.26 113.247,68.17 v1(113.284,68.17)
TTL_IN_0: J1.33 U9.4 | length 38.3
  Top Layer w0.12: U9.4@73.376,110.883 73.376,111.508 82.772,120.904 96.901,120.904 103.505,127.508 J1.33@103.505,128.397
TTL_IN_1: J1.32 U9.5 | length 39.6
  Top Layer w0.15: U9.5@72.726,110.883 72.726,111.508 82.503,121.285 95.885,121.285 99.695,125.095 99.695,129.667 J1.32@100.965,130.937
TTL_OUT_0: J1.35 U9.2 | length 39.6
  Top Layer w0.15: U9.2@74.676,110.883 74.676,111.508 83.31,120.142 98.806,120.142 106.045,127.381 J1.35@106.045,128.397
TTL_OUT_1: J1.36 U9.3 | length 42
  Top Layer w0.15: U9.3@74.026,110.883 74.026,111.508 83.041,120.523 97.79,120.523 104.775,127.508 104.775,129.667 J1.36@106.045,130.937
VCC_TTL: C9.2 C10.2 SW1.2 U9.14 | length 37.6
  Top Layer w0.3: SW1.2@54.443,87.007 55.995,87.007 v1(56.007,86.995) ; U9.14@75.326,105.283 75.326,105.239 75.351,105.214 C9.2@76.835,105.214 76.864,105.185 78.514,105.185 C10.2@78.543,105.156 78.505,105.118 78.505,103.651 v1(78.486,103.632)
  In_3 w0.3: v1(56.007,86.995) 57.023,88.011 57.023,91.186 62.267,96.43 71.284,96.43 v1(78.486,103.632)
pads on no net: SW1. U1.1 U2.1 U9.6 U9.9 U10.2 U10.6 U10.7

## Polygon pours and split planes (outlines as drawn)
GND on In_1 "NONET_L-01_P-001" (solid, remove dead copper, pour order 0): 50.292,135.001 50.292,57.658 123.825,57.658 123.825,135.001
GND on In_4 "NONET_L-01_P-001" (solid, remove dead copper, pour order 2): 50.292,135.001 50.292,57.658 123.825,57.658 123.825,135.001
GND on In_2 "NONET_L-01_P-001" (solid, remove dead copper, pour order 4): 50.292,135.001 50.292,57.658 123.825,57.658 123.825,135.001
3V3 on In_3 "NONET_L-01_P-001" (solid, remove dead copper, pour order 5): 50.292,135.001 50.292,57.658 123.825,57.658 123.825,135.001
GND on Bottom Layer "NONET_L-01_P-001" (solid, remove dead copper, pour order 6): 50.292,135.001 50.292,57.658 123.825,57.658 123.825,135.001
GND on Top Layer "NONET_L-01_P-001" (solid, remove dead copper, pour order 3): 50.318,134.99 50.318,57.647 123.851,57.647 123.851,134.99

## Silkscreen, mask and mechanical layers (free items; w line width, h text height)
Top Overlay:
  text "40" at 111.098,132.561 h0.5
  text "1" at 60.044,126.846 h0.5
  text "39" at 111.098,126.084 h0.5
  text "For / Kria KR260 Robotics Starter Kit" at 69.218,116.459 h1
  text "OUT 0" at 91.821,115.189 h2
  text "DAC 0" at 104.013,115.062 h2
  text "IN 0" at 64.643,114.935 h2
  text "OUTPUT RANGE" at 111.633,108.585 h1
  text "0-3V3" at 112.903,106.934 h2
  text "IN 1" at 64.77,100.076 h2
  text "OUT 1" at 91.948,99.695 h2
  text "DAC 1" at 104.013,99.695 h2
  text "3V3" at 52.579,94.869 h1.52 r270
  text "NCLP / Neural Closed-loop Platform / Rev 3.0 / © 2026 Cade Chen" at 63.895,94.869 h1
  text "Developed in the Diba Lab / In collaboration with the Kemere Lab / Open Source Hardware" at 92.089,94.615 h1
  text "IN/OUT Loigic Level" at 55.626,94.107 h1.52 r270
  text "PWR" at 114.908,87.095 h0.5
  text "5V" at 52.578,82.931 h1.52 r270
  text "ERROR" at 114.146,80.999 h0.5
  text "RUN" at 115.289,75.03 h0.5
  text "C" at 90.805,73.152 h10
  text "A" at 55.875,73.025 h10
  text "B" at 73.533,73.025 h10
  text "D" at 108.331,73.025 h10
Bottom Overlay:
  drawing of 312 lines, arcs and shapes, not listed
Mechanical 1:
  the board outline again, w0.254